# Altium PCB 我的底板.PcbDoc
Units mil, origin at the board's own origin, x right, y up, seen from the top; angles counter-clockwise.
Board outline 3975 x 2365 mil, 2 copper layers (Top Layer, Bottom Layer); 18 components, 33 nets, 122 pads, 204 vias.
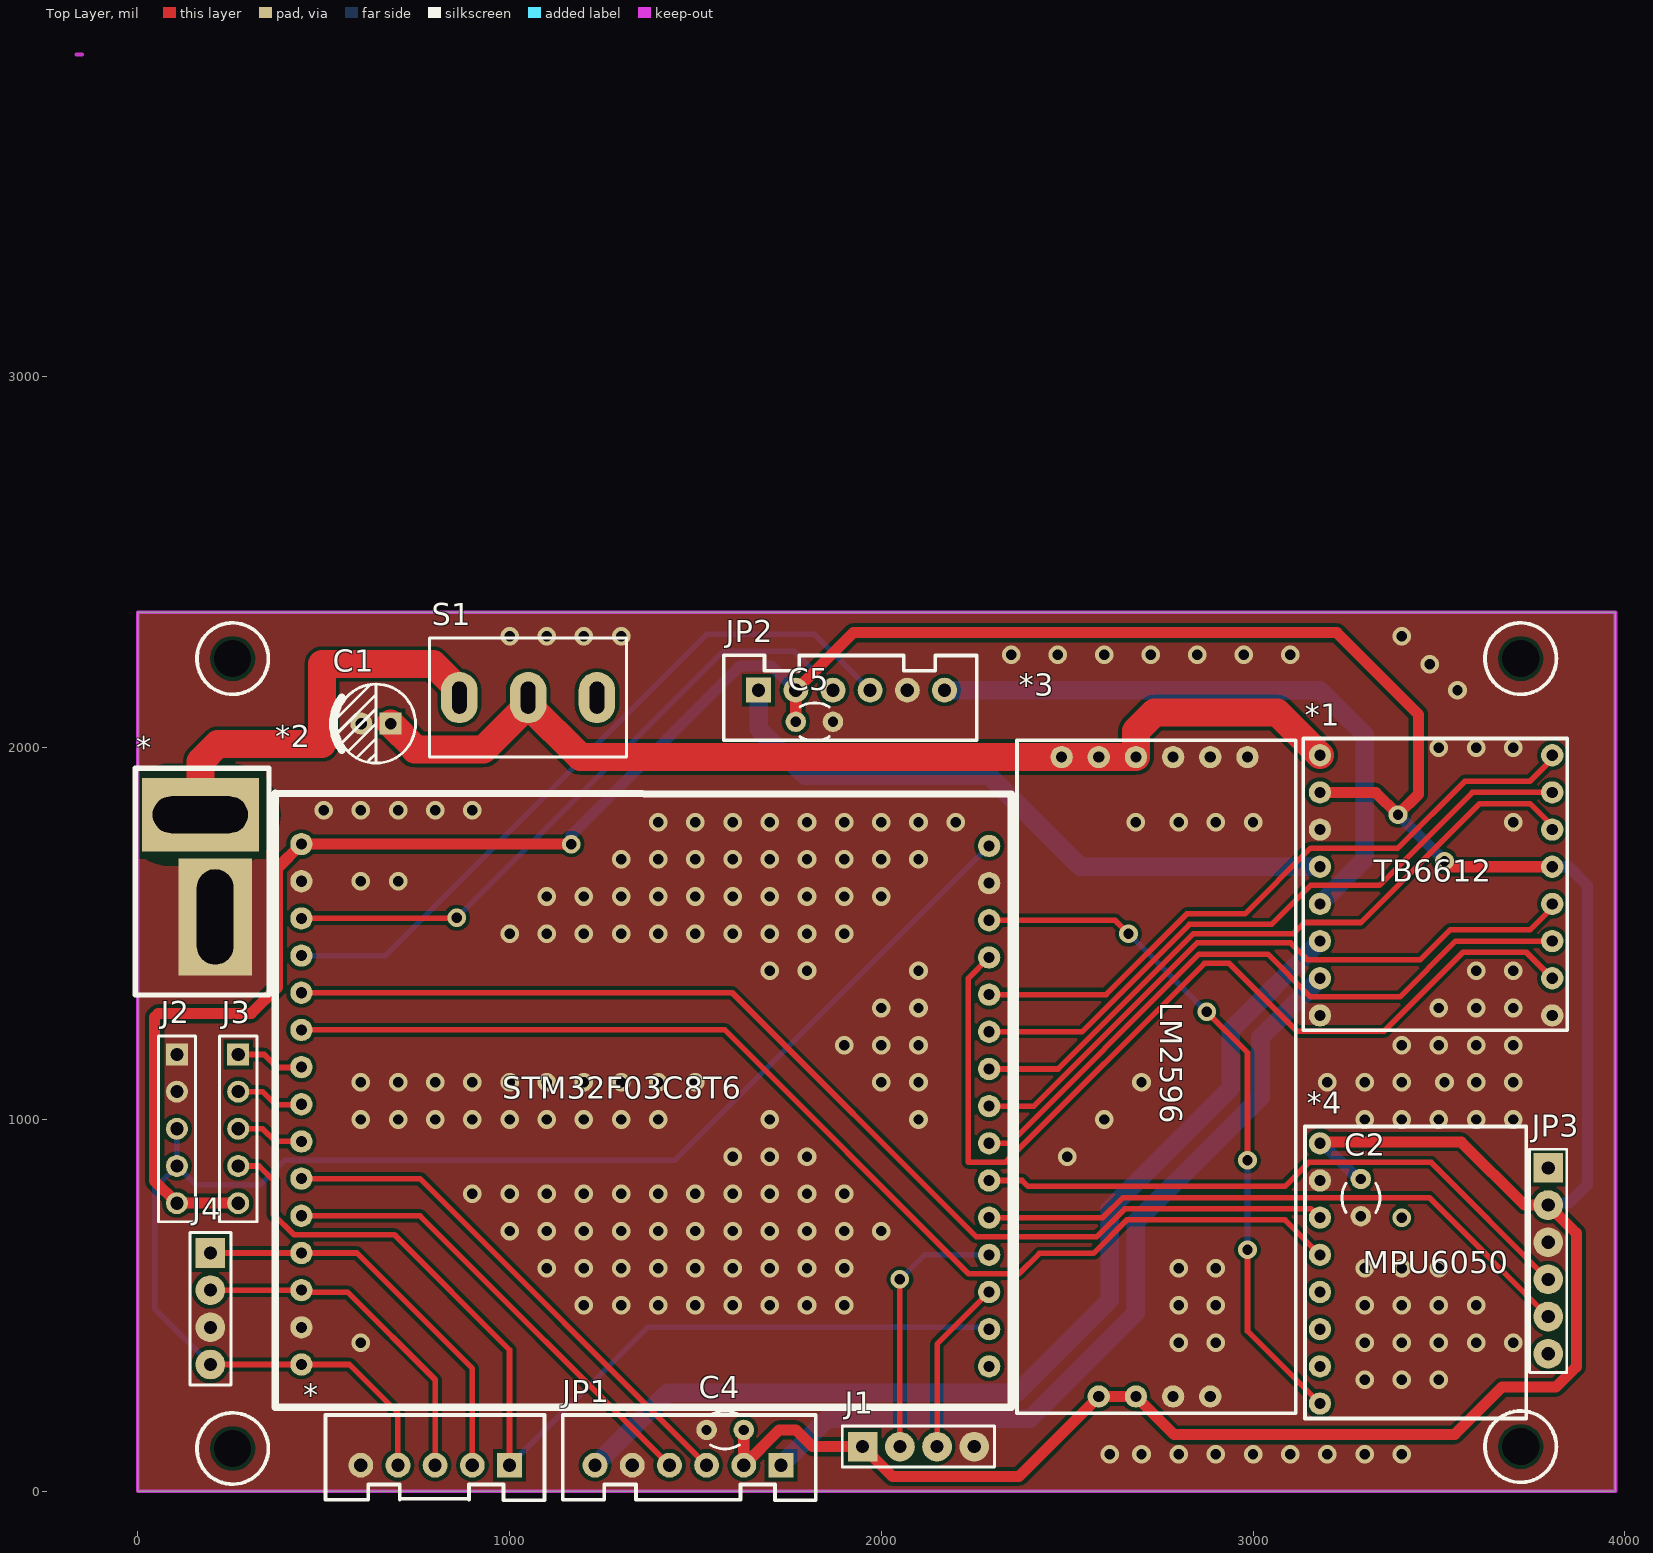
[diagram p0: Top Layer view]
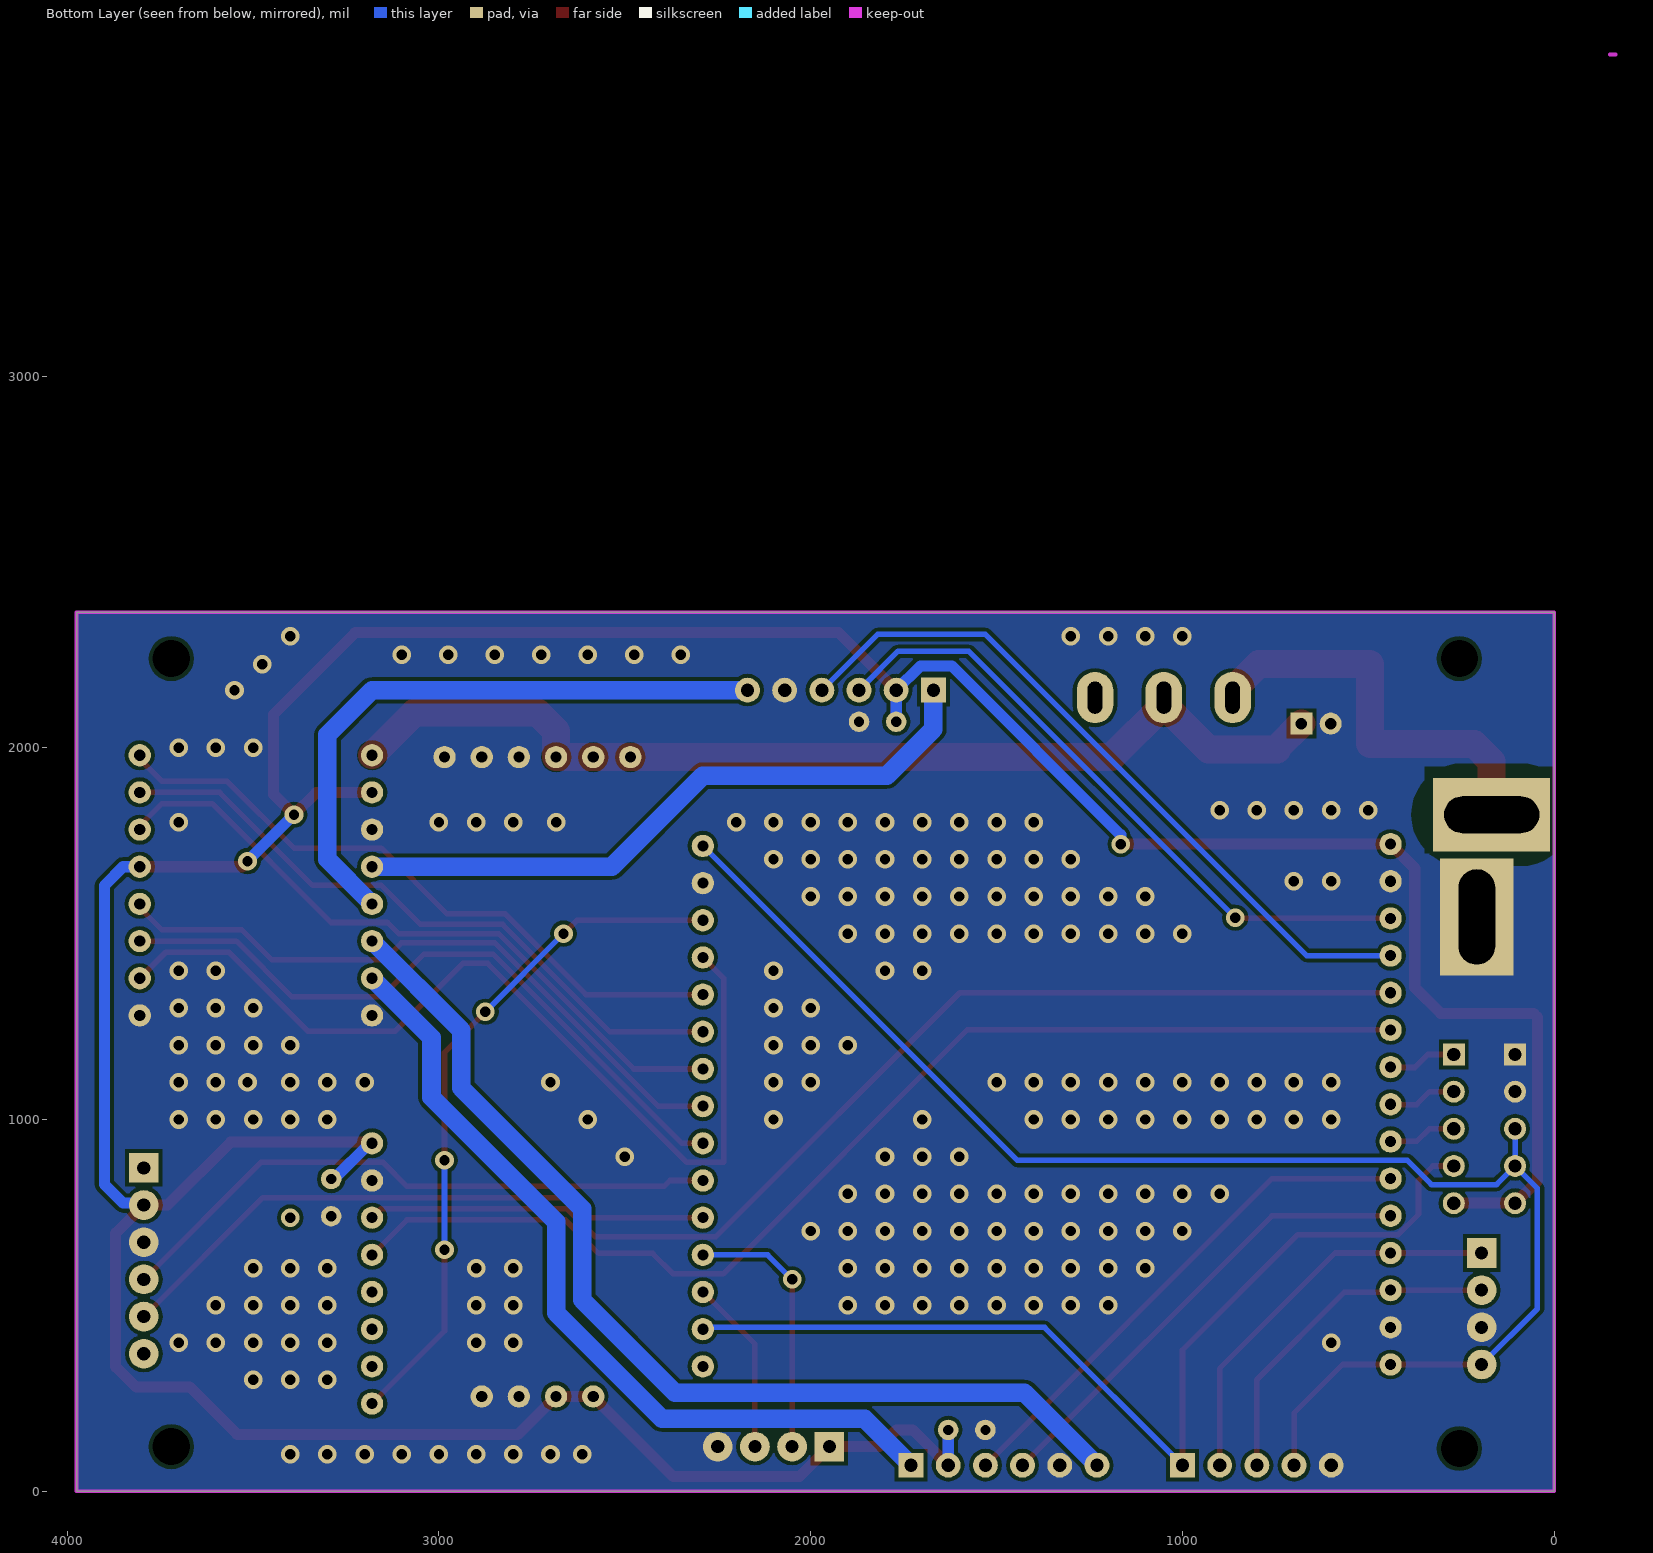
[diagram p1: Bottom Layer view, seen from below]

## Layer stack, top to bottom
Top Solder: solder mask 0.4, Solder Resist, Dk 3.5
Top Layer: signal copper 1.4
Dielectric 1: dielectric 12.6, FR-4, Dk 4.8
Bottom Layer: signal copper 1.4
Bottom Solder: solder mask 0.4, Solder Resist, Dk 3.5

## Board outline
0,0 0,2365 3975,2365 3975,0

## Design rules (kind name [scope] priority, off if disabled: settings)
Clearance Clearance_1 [InPolygon] p1: gap=10 ignorepadtopadclearanceinfootprint=TRUE
Clearance [All] p2: gap=10 ignorepadtopadclearanceinfootprint=TRUE except(0: Arc-SMDPad Arc-THPad Arc-Hole Track-SMDPad Track-THPad Track-Hole SMDPad-SMDPad SMDPad-THPad SMDPad-Via SMDPad-Fill SMDPad-Poly SMDPad-Region SMDPad-Text SMDPad-Hole THPad-THPad THPad-Via THPad-Fill THPad-Poly THPad-Region THPad-Text THPad-Hole Via-Hole Fill-Hole Poly-Hole Region-Hole Text-Hole)
ComponentClearance [All] p1: gap=0 collisioncheckmode=3 verticalgap=0 showdistances=TRUE
PolygonConnect PolygonConnect_1 [IsVia vs IsVia] p1: connectstyle=Relief reliefconductorwidth=10 reliefentries=4 polygonreliefangle="90 Angle" airgapwidth=10
PolygonConnect [All] p2: connectstyle=Direct reliefconductorwidth=10 reliefentries=4 polygonreliefangle="90 Angle" airgapwidth=10
RoutingCorners [All] p1: cornerstyle=Round minsetback=100 maxsetback=100
RoutingVias [All] p1: holewidth=50 width=200 viastyle="Through Hole" minholewidth=5 minwidth=5 maxholewidth=28 maxwidth=50
SolderMaskExpansion [All] p1: expansion=4
Width [All] p1: maxlimit=100 minlimit=5 preferedwidth=15 minimp=50.000000 maximp=50.000000 favimp=50.000000
28 further rules are at their usual default settings.

## Classes and differential pairs
component class 我的底板: * *1 *2 *3 *4 C1 C2 C4 C5 J1 J2 J3 J4 JP1 JP2 JP3 S1

## Components (designator, comment, footprint, x,y, rotation, side; value= is the part's Value field where it differs from the comment)
* "电源T头" T型接口封装 -61.95,1645 r0 top
* "线性CCD" XH2.54-LI-5P 749.71,90 r180 top
*1 "TB6612电机驱动模块" 电源模块 3135,2025 r0 top
*2 "STM32F103C8T6" STM32_DIP30 364.99,1880.99 r0 top
*3 "电源模块" LM2596 3115,2020 r270 top
*4 "MPU6050" MPU6050 3140,980.99 r0 top
C1 "CAP-T" "CAP 2.0*5*11" 640.63,2065 r180 top
C2 "Cap" C-RAD 3290,790 r90 top value=100pF
C4 "Cap" C-RAD 1580,165 r0 top value=100pF
C5 "Cap" C-RAD 1820,2070 r180 top value=100pF
J1 "超声波" 4P 2100,120 r0 top
J2 "拓展电源" HDR1X5 105,1175 r270 top
J3 "拓展IO1" HDR1X5 270,1175 r270 top
J4 "拓展IO2" 4P 195,490.99 r270 top
JP1 "电机1" XH2.54-LI-6P 1480,70 r180 top
JP2 "电机2" XH2.54-LI-6P 1920,2155 r0 top
JP3 "蓝牙" 6P 3793.95,620 r270 top
S1 "MTS-10x" MTS-10x 1050,2135 r180 top

## Footprints (in the part's own frame and the unit in brackets; to place one, negate y for a bottom-side part, rotate by r counter-clockwise, add the part's x,y. Pads: shape width x height; smd on the part's side, far side on the other; paste and mask are expansions set on the pad)
4P [mil]
  rect 80x80 hole 35: 1(-150,0)
  round 80 hole 35: 2(-50,0) 3(50,0) 4(150,0)
  silkscreen extent -205,-55 205,55
6P [mil]
  rect 80x80 hole 35.43: 1(-250,0)
  round 80 hole 35.43: 2(-150,0) 3(-50,0) 4(50,0) 5(150,0) 6(250,0)
  silkscreen extent -300,-50 300,50
C-RAD [mm] "瓷片电容"
  round 1.4 hole 0.7: 1(-1.27,0) 2(1.27,0)
  silkscreen extent -1.02,-1.3 0.98,1.3
"CAP 2.0*5*11" [mm]
  rect 1.5x1.5 hole 0.8: 1(-1,0)
  round 1.5 hole 0.8: 2(1,0)
  silkscreen extent -2.7,-2.7 2.96,2.7, body extent -2.5,-2.5 2.51,2.5, height 11.04
HDR1X5 [mm] "Connector; Header; 5 Position"
  rect 1.5x1.5 hole 0.9: 1(0,0)
  round 1.5 hole 0.9: 2(2.54,0) 3(5.08,0) 4(7.62,0) 5(10.16,0)
  silkscreen extent -1.27,-1.27 11.43,1.27
LM2596 [mil]
  round 60 hole 30: 1(45,-130) 2(45,-230) 3(45,-330) 4(45,-430) 5(45,-530) 6(45,-630) 7(1765,-530) 8(1765,-430) 9(1765,-330) 10(1765,-230)
  silkscreen extent 0,-750 1810,0, body extent -90,90 -90,90, height 10
MPU6050 [mil]
  round 60 hole 30: 1(40,-45) 2(40,-145) 3(40,-245) 4(40,-345) 5(40,-445) 6(40,-545) 7(40,-645) 8(40,-745)
  silkscreen extent 0,-785 595,0
MTS-10x [mm]
  oval 2.5x3.5 hole 1 slot 2.2 at 90 deg: 1(-4.7,0) 2(0,0) 3(4.7,0)
  silkscreen extent -6.73,-4.06 6.73,4.06
STM32_DIP30 [mil]
  round 60 hole 30: 1(75,-140) 2(75,-240) 3(75,-340) 4(75,-440) 5(75,-540) 6(75,-640) 7(75,-740) 8(75,-840) 9(75,-940) 10(75,-1040) 11(75,-1140) 12(75,-1240) 13(75,-1340) 14(75,-1440) 15(75,-1540) 16(1925,-1545) 17(1925,-1445) 18(1925,-1345) 19(1925,-1245) 20(1925,-1145) 21(1925,-1045) 22(1925,-945) 23(1925,-845) 24(1925,-745) 25(1925,-645) 26(1925,-545) 27(1925,-445) 28(1925,-345) 29(1925,-245) 30(1925,-145)
  silkscreen extent 5,-1655 1985,-3
T型接口封装 [mm]
  rect 8x5 hole 6.5 slot 2.5 at 90 deg paste+0 mask+0.35: 1(5.842,4.445)
  rect 5x8 hole 6.5 slot 2.5 at 0 deg mask+0.35: 2(6.858,-2.54)
  silkscreen extent 1.4,-7.87 10.54,7.62
XH2.54-LI-5P [mm]
  rect 1.7x1.7 hole 0.9: 1(-6.35,0.508)
  round 1.7 hole 0.9: 2(-3.81,0.508) 3(-1.27,0.508) 4(1.27,0.508) 5(3.81,0.508)
  silkscreen extent -8.74,-2.92 6.22,2.9, body extent -9.7,-3.05 8,2.65, height 7.03
XH2.54-LI-6P [mm]
  rect 1.7x1.7 hole 0.9: 1(-6.35,0)
  round 1.7 hole 0.9: 2(-3.81,0) 3(-1.27,0) 4(1.27,0) 5(3.81,0) 6(6.35,0)
  silkscreen extent -8.74,-3.43 8.56,2.39, body extent -8.85,-3.3 8.85,2.4, height 7.03
电源模块 [mil]
  round 60 hole 30: 1(45,-45) 2(45,-145) 3(45,-245) 4(45,-345) 5(45,-445) 6(45,-545) 7(45,-645) 8(45,-745) 9(670,-745) 10(670,-645) 11(670,-545) 12(670,-445) 13(670,-345) 14(670,-245) 15(670,-145) 16(670,-45)
  silkscreen extent 0,-785 710,0

## Part data
*: library part "Header 5", "5P接插件"
C1: "钽电容"
C2 C4 C5: "Capacitor", LatestRevisionDate=17-Jul-2002, LatestRevisionNote="Re-released for DXP Platform.", PackageDescription="Radial Cap, Thru-Hole; 2 Leads; 0.3 in Pin Spacing", PackageReference=RAD-0.3, Published=8-Jun-2000, Publisher="Altium Limited"
J1 J4: library part CON4, "Connector"
J2 J3: library part CON5, "Connector"
JP1 JP2 JP3: library part "Header 6", "6P接插件", BOM名称=6P, 学习资源=www.oooc
S1: "MTS10x系列3脚扭子开关"

## Free pads (board coordinates)
  round 60 hole 100: 18(255,115) 18(255,2240) 18(3720,120) 18(3720,2240)

## Via types
v1: diameter 50, hole 28, Top Layer to Bottom Layer, 204 vias

## Nets (pads, with @x,y where several pads share a name; then routed paths per layer and width w, separated by ;. In a path a pad name is that pad's centre, name@x,y a point inside that pad or via, vN(x,y) a via of type N, cw(c..) or ccw(c..) an arc to the next point about the centre after c; other vN are vias at no path point)
3V3: *2.15 *2.30 *.4 J2.3 J2.4 J4.4 | length 4003.2
  Top Layer w15: J4.4 *2.15 569.01,340.99 699.71,210.29 *.4
  Bottom Layer w15: J2.3 J2.4 ; J4.4 45,490.99 45,815 J2.4 ; *2.30 1444,890 395,890 330,825 155,825 J2.4
5V: *1.2 *1.13 *2.1 *3.7 *3.8 *4.1 C2.2 C4.2 C5.2 J1.1 J2.5 J3.5 JP1.2 JP2.2 JP3.2 | length 11111.9
  Top Layer w15: *4.1 *4.1@3184.01,940 ; v1(3515,1695) v1@3530,1680
  Top Layer w30: J3.5@265,775 J2.5 45,835 45,1275 55,1285 305,1285 375,1355 375,1676 *2.1 v1(1165.99,1740.99) ; C4.2 JP1.2 1725,165 1770,165 1815,120 J1.1 2030,40 2370,40 *3.7 *3.8 2787.5,152.5 3542.5,152.5 3670,280 3815,280 3870,335 3870,693.95 JP3.2 3730,770 3560,940 *4.1@3184.01,940 ; C5.2 JP2.2 1925,2310 3225,2310 3445,2090 3445,1875 v1(3390,1820) 3330,1880 *1.2 ; v1@3530,1680 *1.13
  Bottom Layer w15: *4.1 *4.1@3187.01,935.99 ; C2.2@3283,840 C2.2 ; JP3.2 JP3.2@3798.95,775
  Bottom Layer w30: v1(1165.99,1740.99) 1165.99,1765.99 1620,2220 1705,2220 JP2.2 C5.2 ; JP1.2 C4.2 ; *4.1@3187.01,935.99 C2.2@3283,840 ; v1(3390,1820) v1(3515,1695) ; JP3.2@3798.95,775 3850,775 3900,825 3900,1630 3850,1680 *1.13
12V: *1.1 *3.4 *3.5 *3.6 C1.1 S1.2 | length 2797.9
  Top Layer w15: S1.2@1050,2115.31 S1.2
  Top Layer w75: C1.1 745,2000 745,1995 929.69,1995 1050,2115.31 1190.31,1975 *3.6 *3.5 *3.4 2685,2045 2735,2095 3065,2095 *1.1
AO1: *1.4 JP2.1 | length 1768.3
  Bottom Layer w50: JP2.1 1670,2050 1795,1925 2290,1925 2535,1680 *1.4
AO2: *1.5 JP2.6 | length 1684.4
  Bottom Layer w50: JP2.6 3180,2155 3300,2035 3300,1700 *1.5
BO1: *1.7 JP1.1 | length 2229.9
  Bottom Layer w50: JP1.1 1855,195 2400,195 2685,480 2685,585 2685,725 3020,1060 3020,1220 *1.7
BO2: *1.6 JP1.6 | length 2768.4
  Bottom Layer w50: JP1.6 1425,265 2365,265 2615,515 2615,760 2940,1085 2940,1240 *1.6
GND: *1.3 *1.8 *1.9 *2.2 *2.14 *2.29 *3.1 *3.2 *3.3 *3.9 *3.10 *4.2 *.2@208.05,1545 *.5 C1.2 C2.1 C4.1 C5.1 J1.4 J2.1 J2.2 J4.3 JP1.5 JP2.5 JP3.3
  other v1: 2615,100 2700,100 2800,100 2900,100 3000,100 3100,100 3200,100 3300,100 3400,100 3300,300 3400,300 3500,300 600,400 2800,400 2900,400 3300,400 3400,400 3500,400 3600,400 3700,400 1200,500 1300,500 1400,500 1500,500 1600,500 1700,500 1800,500 1900,500 2800,500 2900,500 3300,500 3400,500 3500,500 3600,500 1100,600 1200,600 1300,600 1400,600 1500,600 1600,600 1700,600 1800,600 1900,600 2800,600 2900,600 3300,600 3400,600 3500,600 1000,700 1100,700 1200,700 1300,700 1400,700 1500,700 1600,700 1700,700 1800,700 1900,700 2000,700 900,800 1000,800 1100,800 1200,800 1300,800 1400,800 1500,800 1600,800 1700,800 1800,800 1900,800 1600,900 1700,900 1800,900 2500,900 600,1000 700,1000 800,1000 900,1000 1000,1000 1100,1000 1200,1000 1300,1000 1400,1000 1700,1000 2100,1000 2600,1000 3300,1000 3400,1000 3500,1000 3600,1000 3700,1000 600,1100 700,1100 800,1100 900,1100 1000,1100 1100,1100 1200,1100 1300,1100 1400,1100 1500,1100 2000,1100 2100,1100 2700,1100 3200,1100 3300,1100 3400,1100 3515,1100 3600,1100 3700,1100 1900,1200 2000,1200 2100,1200 3400,1200 3500,1200 3600,1200 3700,1200 2000,1300 2100,1300 3500,1300 3600,1300 3700,1300 1700,1400 1800,1400 2100,1400 3600,1400 3700,1400 1000,1500 1100,1500 1200,1500 1300,1500 1400,1500 1500,1500 1600,1500 1700,1500 1800,1500 1900,1500 1100,1600 1200,1600 1300,1600 1400,1600 1500,1600 1600,1600 1700,1600 1800,1600 1900,1600 2000,1600 600,1640.99 700,1640.99 1300,1700 1400,1700 1500,1700 1600,1700 1700,1700 1800,1700 1900,1700 2000,1700 2100,1700 1400,1800 1500,1800 1600,1800 1700,1800 1800,1800 1900,1800 2000,1800 2100,1800 2200,1800 2685,1800 2800,1800 2900,1800 3000,1800 3700,1800 500,1832.5 600,1832.5 700,1832.5 800,1832.5 900,1832.5 3500,2000 3600,2000 3700,2000 3550,2155 3475,2225 2350,2250 2475,2250 2600,2250 2725,2250 2850,2250 2975,2250 3100,2250 1000,2300 1100,2300 1200,2300 1300,2300 3400,2300
Net*_1: *.1@168.05,1820 S1.3 | length 1123.2
  Top Layer w15: S1.3 S1.3@864.96,2154.69
  Top Layer w75: *.1@168.05,1820 168.05,1963.05 215,2010 495,2010 495,2225 794.65,2225 S1.3@864.96,2154.69
PA0: *2.10 JP1.3 | length 1409.4
  Top Layer w15: *2.10 759.01,840.99 JP1.3
PA1: *2.11 JP1.4 | length 1267.9
  Top Layer w15: *2.11 759.01,740.99 JP1.4
PA2: *2.12 *.2@899.71,70 J4.1 | length 1093.7
  Top Layer w15: J4.1 *2.12 589.01,640.99 899.71,330.29 *.2@899.71,70
PA3: *2.13 *.3 J4.2 | length 948.7
  Top Layer w15: J4.2 *2.13 445.98,535 565,535 800,300 800,70.29 *.3 *.3@790,79.71
PA6: *2.16
PA7: *2.17 *.1@999.71,70 J3.4 | length 2744.2
  Top Layer w15: J3.4 325.99,875 365,835.99 365,745 420,690 690,690 999.71,380.29 *.1@999.71,70
  Bottom Layer w15: *.1@999.71,70 1370.7,440.99 2284.99,440.99 *2.17
PA8: *1.16 *2.26 | length 1791.8
  Top Layer w15: *2.26 2604.57,1335.99 2821.58,1553 2978,1553 3155,1730 3389.64,1730 3569.64,1910 3745,1910 *1.16@3815,1980
PA11: *1.10 *2.27 | length 2559.7
  Top Layer w15: *2.27 2233.79,1379.79 2233.79,885 2334.01,885 2869.01,1420 2935.99,1420 3118.49,1237.5 3352.5,1237.5 3565,1450 3735,1450 *1.10
PA12: *2.28 *4.8 | length 1867.2
  Top Layer w15: *2.28 2629.01,1535.99 v1(2665,1500) ; v1(2875,1290) 2985,1180 v1(2985,890) ; v1(2985,650) 2985,430.99 *4.8
  Bottom Layer w15: v1(2665,1500) v1(2875,1290) ; v1(2985,650) v1(2985,890)
PB0: *2.18 J1.3 | length 474
  Top Layer w15: J1.3 2150,396 *2.18
PB1: *2.19 J1.2 | length 717.3
  Top Layer w15: J1.2 v1(2050,570)
  Bottom Layer w15: v1(2050,570) 2115.99,635.99 *2.19
PB6: *2.3 JP2.3 | length 1777.2
  Top Layer w15: *2.3 440.99,1541.99 856.99,1541.99 v1(857.99,1542.99)
  Bottom Layer w15: v1(857.99,1542.99) 1575,2260 1765,2260 1860,2165 1860,2155 JP2.3
PB7: *2.4 JP2.4 | length 1950
  Bottom Layer w15: *2.4 665.99,1440.99 1530,2305 1820,2305 JP2.4
PB8: *2.5 *4.3 | length 3052.7
  Top Layer w15: *2.5 1599.01,1340.99 2255,685 2580,685 2655,760 3155.99,760 *4.3
PB9: *2.6 *4.4 | length 3110.7
  Top Layer w15: *2.6 1579.01,1240.99 2235,585 2370,585 2425,640 2570.36,640 2660.36,730 3085.99,730 *4.4
PB10: *2.20 JP3.5 | length 1658.9
  Top Layer w15: *2.20 2595.63,735.99 2649.64,790 3473.95,790 JP3.5
PB11: *2.21 JP3.4 | length 1668
  Top Layer w15: *2.21 2379.01,835.99 2395,820 3085.99,820 3150.99,885 3478.95,885 JP3.4
PB12: *1.11 *2.22 | length 1845.6
  Top Layer w15: *2.22 2345.99,935.99 2855,1445 3040,1445 3155,1330 3395,1330 3545,1480 *1.11 *1.11@3815,1480
PB13: *1.12 *2.23 | length 1787.6
  Top Layer w15: *2.23 2410.63,1035.99 2849.64,1475 3100.99,1475 3145.99,1430 3450,1430 3530,1510 3745,1510 *1.12@3815,1580
PB14: *1.14 *2.24 | length 1849.8
  Top Layer w15: *2.24 2475.28,1135.99 2839.29,1500 3108.42,1500 3138.42,1530 3289.9,1530 3609.9,1850 3745,1850 *1.14@3815,1780
PB15: *1.15 *2.25 | length 1791.8
  Top Layer w15: *2.25 2539.92,1235.99 2828.93,1525 3050,1525 3155,1630 3340,1630 3590,1880 *1.15 *1.15@3815,1880
PC13: *2.7 J3.1 | length 184.9
  Top Layer w15: J3.1 340,1175 375,1140 439,1140 *2.7
PC14: *2.8 J3.2 | length 184.9
  Top Layer w15: J3.2 335,1075 370,1040 439,1040 *2.8
PC15: *2.9 J3.3 | length 184.1
  Top Layer w15: J3.3 335.99,975 370,940.99 *2.9
pads on no net: *4.5 *4.6 *4.7 JP3.1 JP3.6 S1.1
copper on no net:
  other v1: 3400,735.99

## Polygon pours and split planes (outlines as drawn)
GND on Bottom Layer "GND_L02_P002" (solid, pour order 2): 0,0 0,2365 3975,2365 3975,0
GND on Top Layer "GND_L01_P003" (solid, pour order 3): 0,0 0,2365 3975,2365 3975,0

## Keep-outs
Keep-Out Layer:
  lines w10: -165,3865 -150,3865 ; 0,0 3975,0 3975,2365 0,2365 0,0

## Other copper
Top Layer:
  pour cut-out: 0,1945 345,1946.57 345,1715.76 345,1700 0,1700
  pour cut-out: 1.72,1948.28
  pour cut-out: 1.72,1948.28
  pour cut-out: 36.98,1935
  pour cut-out: 0,1940 1.12,1941.12 335,1941.12 335,1720 0,1720
Bottom Layer:
  pour cut-out: 0,1950 349.51,1950 349.51,1715 0,1715

## Silkscreen, mask and mechanical layers (free items; w line width, h text height)
Top Overlay:
  circle w10: c255,2240 r96.05
  circle w10: c255,115 r96.05
  circle w10: c3720,120 r96.05
  circle w10: c3720,2240 r96.05
Bottom Overlay:
Mechanical 1:
  the board outline again, w30

## Text inside footprints (layer, text, board x,y; h text height)
*1: Top Overlay "TB6612" at 3325,1640 h60
*2: Top Overlay "STM32F03C8T6" at 979.99,1055.99 h60
*3: Top Overlay "LM2596" at 2750,1315 h60 r270